# EAGLE board Sizzling Snaget-Lahdi (EAGLE 9.7.0)

Size 544.25 x 131.58 mm. Coordinates in mm from the lower left corner, seen from the top.
Outline: 0,0 544.25,0 544.25,131.58 0,131.58 0,0
Copper layers (1*16): Top 0.035mm / dielectric 1.5mm / Bottom 0.035mm
Design rules "default": minimum track width 6mil, minimum drill 0.35mm, track to track 6mil, track to pad 6mil, pad to pad 6mil, via to via 6mil, smd to smd 6mil, copper to edge 40mil, drill to drill 6mil, minimum pad ring 10mil, minimum via ring 8mil, stop-mask expansion 4mil, vias tented up to drill 0mil, thermal gap 10mil

## Footprints (pad centres in the part's own frame; a part is rotated, then mirrored left to right if it is on the bottom)
BATTERY-GENERIC = drill 1.118 pad 3.15 octagon: + 2.54,0; - -2.54,0
LEDRD254W60D565H860B = drill 0.981 pad 1.581: 1 -1.27,0; 2 1.27,0
1X02 = drill 1.016 long: 1 -1.27,0; 2 1.27,0
RESAD1016W63L850D250B = drill 0.83 pad 1.43: 1 -5.08,0; 2 5.08,0
78F01T = drill 0.8: 1 -1.27,-3.81; 2 1.27,-3.81; 3 1.27,3.81; 4 -1.27,3.81

## Placement (x,y rotation side)
BAT1  9V  [BATTERY-GENERIC]  267.96,40.11 270 top
BAT2  9V  [BATTERY-GENERIC]  8.67,73.47 90 top
BAT3  9V  [BATTERY-GENERIC]  116.34,115.5 180 top
BAT4  9V  [BATTERY-GENERIC]  187.91,75.51 180 top
BAT5  9V  [BATTERY-GENERIC]  8.26,28.94 90 top
BAT6  9V  [BATTERY-GENERIC]  370.9,34.17 270 top
BAT7  9V  [BATTERY-GENERIC]  535.23,39.65 270 top
D4  RED  [LEDRD254W60D565H860B]  29.83,7.91 0 top
L1  LIGHTBULB  [1X02]  116.36,124.22 0 top
L2  LIGHTBULB  [1X02]  192.46,125.3 0 top
L3  LIGHTBULB  [1X02]  266.32,87.53 0 top
L4  LIGHTBULB  [1X02]  236.36,87.53 0 top
L5  LIGHTBULB  [1X02]  399.55,125.06 0 top
L6  LIGHTBULB  [1X02]  399,93.08 0 top
L7  LIGHTBULB  [1X02]  537.92,83.25 0 top
L8  LIGHTBULB  [1X02]  472.25,118.12 0 top
L9  LIGHTBULB  [1X02]  535.73,119.15 0 top
R2  1k  [RESAD1016W63L850D250B]  470.17,95.16 90 top
R3  1k  [RESAD1016W63L850D250B]  26.28,20.66 270 top
R4  1k  [RESAD1016W63L850D250B]  508.03,117.87 0 top
R5  1k  [RESAD1016W63L850D250B]  537.92,110.7 90 top
SW1  DPST78F01T  [78F01T]  179.42,94.93 0 top
SW2  DPST78F01T  [78F01T]  236.06,42.49 0 top
SW3  DPST78F01T  [78F01T]  352.75,67.12 0 top
SW4  DPST78F01T  [78F01T]  471.7,49.78 0 top

## Library data of the parts
BAT1-BAT7 L1-L9 R2-R5 SW1-SW4 = Tinkercad
D4 = Tinkercad; CATEGORY: Opto-Electronic; SUB-CATEGORY: LED; VALUE: LED_RED

## Nets
BAT1+: BAT1.+ SW2.1
BAT1-: BAT1.- L3.2
BAT2+: BAT2.+ BAT2.-
BAT3+: BAT3.+ L1.1
BAT3-: BAT3.- L1.2
BAT4+: BAT4.+ SW1.1
BAT4-: BAT4.- L2.2
BAT5+: BAT5.+ R3.1
BAT6+: BAT6.+ SW3.1
BAT6-: BAT6.- SW3.2
BAT7+: BAT7.+ SW4.1
BAT7-: BAT7.- L7.2
D4_A: D4.1 R3.2
L4_2: L3.1 L4.2
L5_1: L5.1 L6.2
L7_1: L7.1 R5.1
L8_1: L8.1 R2.2
L8_2: L8.2 R4.1
L9_1: L9.1 R4.2
L9_2: L9.2 R5.2
SW1_4: L2.1 SW1.4
SW2_4: L4.1 SW2.4
SW3_3: L5.2 SW3.3
SW3_4: L6.1 SW3.4
SW4_4: R2.1 SW4.4

## Tracks (layer width: path | path; a pad name or v marks a point on that pad's centre or on a via)
BAT1+  (1 unrouted)
BAT1-  (1 unrouted)
BAT2+  (1 unrouted)
BAT3+  (1 unrouted)
BAT3-  (1 unrouted)
BAT4+  (1 unrouted)
BAT4-  (1 unrouted)
BAT5+  (1 unrouted)
BAT6+  (1 unrouted)
BAT6-  (1 unrouted)
BAT7+  (1 unrouted)
BAT7-  (1 unrouted)
D4_A  (1 unrouted)
L4_2  (1 unrouted)
L5_1  (1 unrouted)
L7_1  (1 unrouted)
L8_1  (1 unrouted)
L8_2  (1 unrouted)
L9_1  (1 unrouted)
L9_2  (1 unrouted)
SW1_4  (1 unrouted)
SW2_4  (1 unrouted)
SW3_3  (1 unrouted)
SW3_4  (1 unrouted)
SW4_4  (1 unrouted)